# Altium PCB RPI 3.PcbDoc
Units mil, origin at the board's own origin, x right, y up, seen from the top; angles counter-clockwise.
Board outline 2558.74 x 2204.72 mil, 2 copper layers (Top Layer, Bottom Layer), stack 61.2 mil thick; 45 components, 48 nets, 202 pads, 44 vias.
Unrouted connection lines stored in the file: 1.
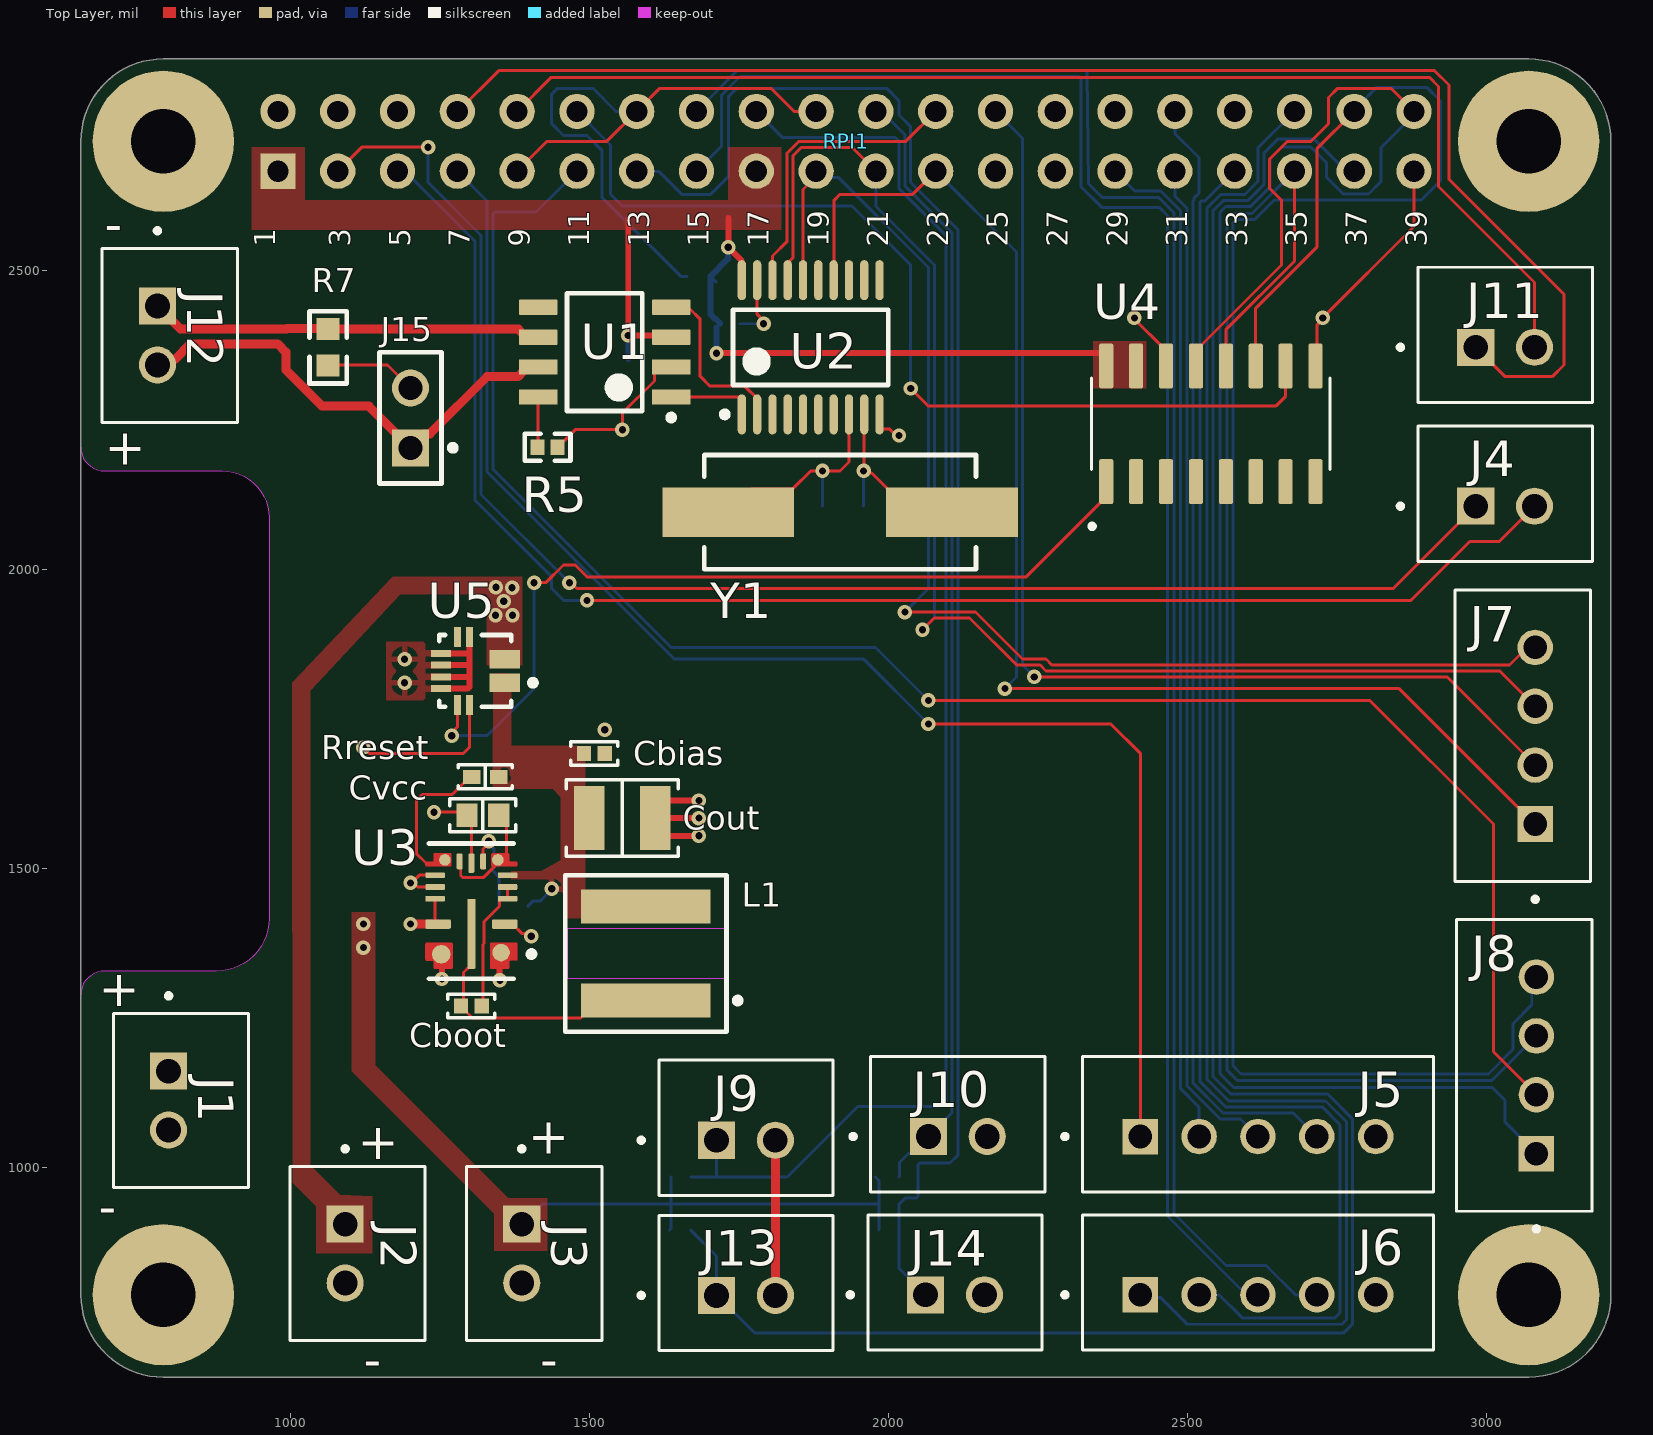
[diagram p0: Top Layer view]
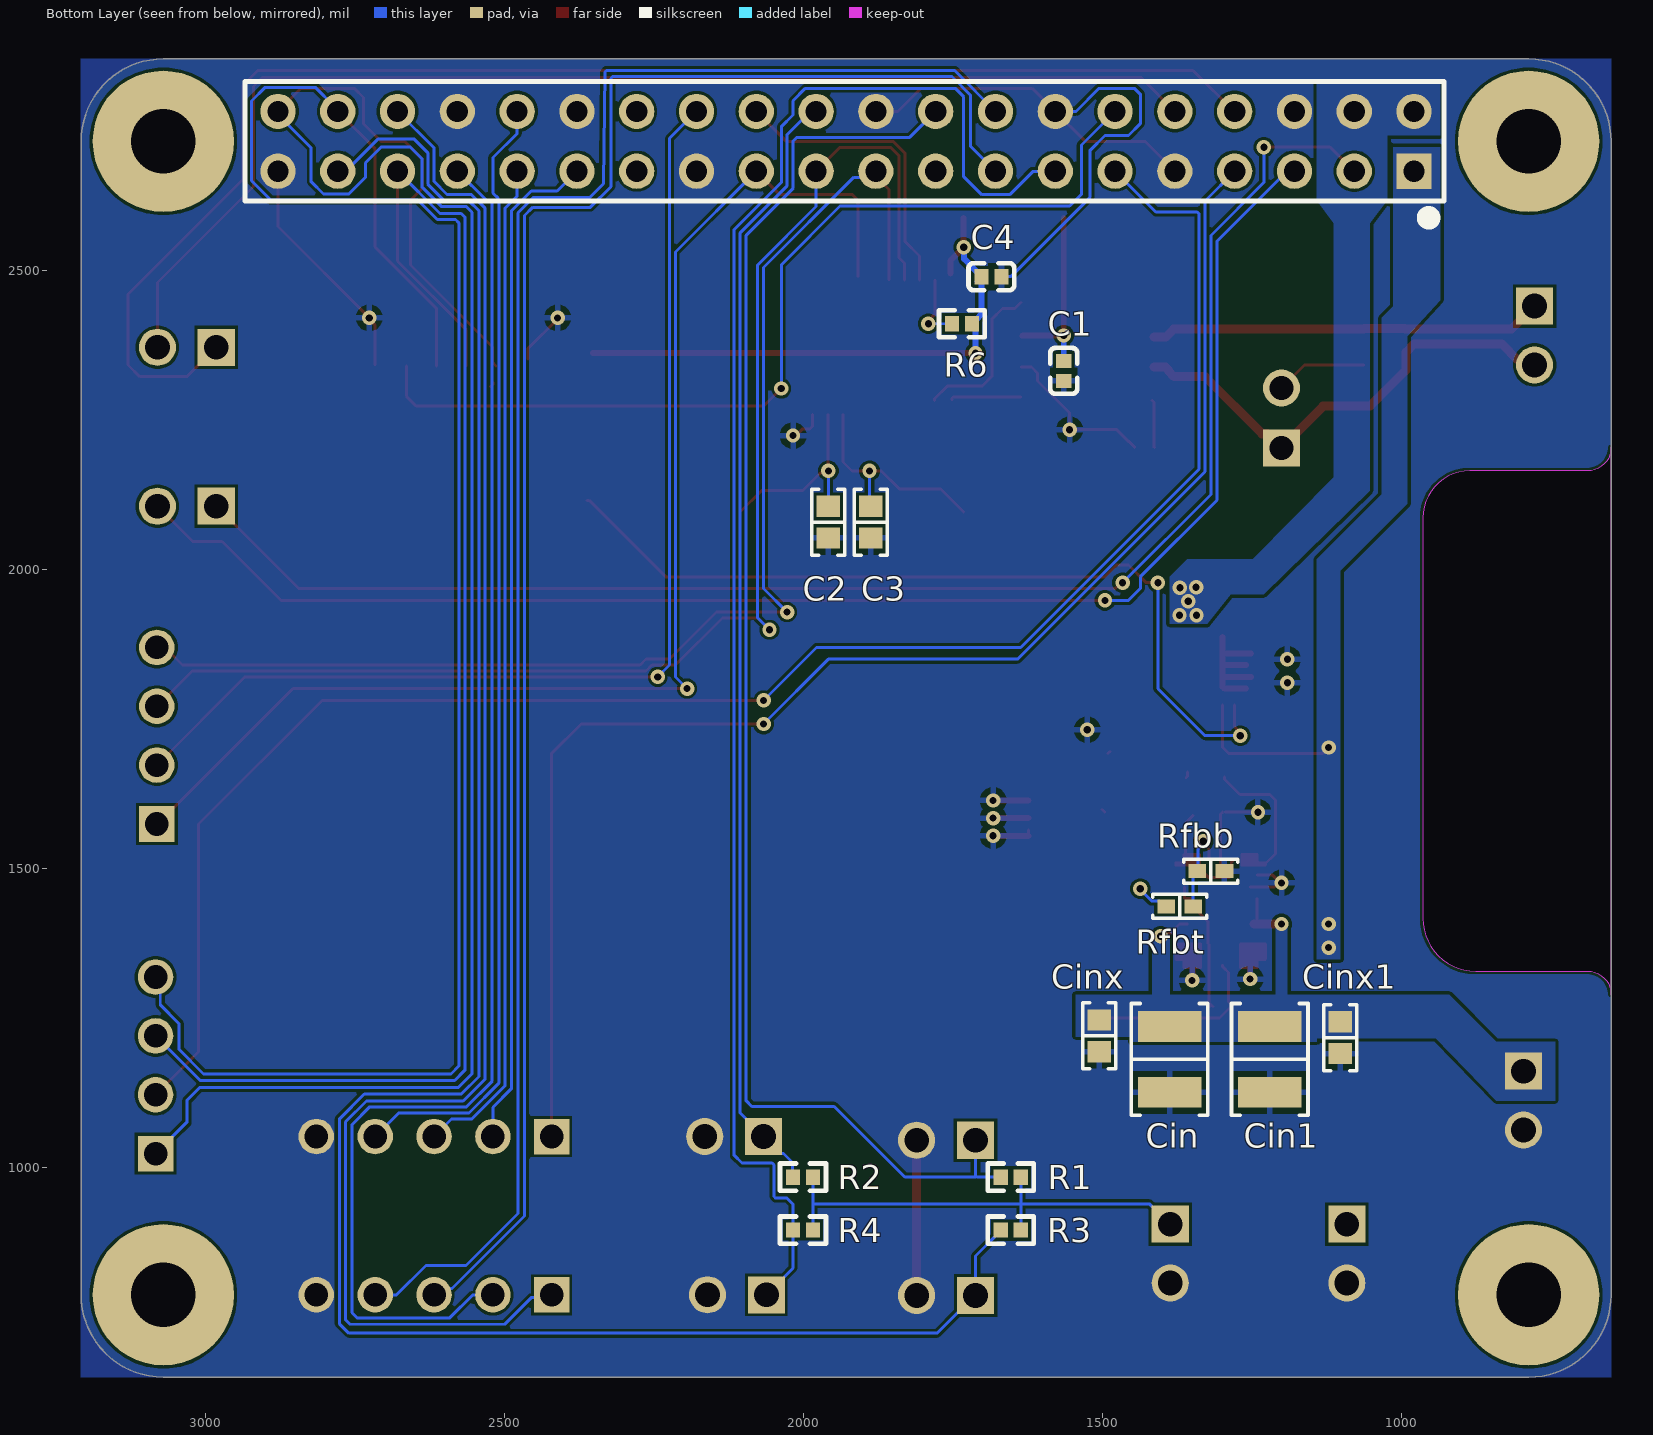
[diagram p1: Bottom Layer view, seen from below]

## Layer stack, top to bottom
Top Solder: solder mask 0.8, Solder Resist, Dk 3.5
Top Layer: signal copper 2.1
Dielectric 1: dielectric 57, FR-4, Dk 4.6
Bottom Layer: signal copper 2.1
Bottom Solder: solder mask 0.8, Solder Resist, Dk 3.5

## Board outline
649.61,787.4 ccw(c787.4,787.4) 787.4,649.61 3070.87,649.61 ccw(c3070.71,787.24) 3208.35,787.4 3208.35,2716.54 ccw(c3070.71,2716.69) 3070.87,2854.33 787.4,2854.33 ccw(c787.4,2716.54) 649.61,2716.54
cut-out: 649.61,1289.37 649.61,2204.72 ccw(c688.97,2204.72) 688.98,2165.35 885.83,2165.35 cw(c885.83,2086.61) 964.57,2086.61 964.57,1417.32 cw(c875.99,1417.32) 875.98,1328.74 688.98,1328.74 ccw(c688.97,1289.37)

## Design rules (kind name [scope] priority, off if disabled: settings)
Clearance [All] p1: gap=5 ignorepadtopadclearanceinfootprint=FALSE except(10: Arc-Hole Track-Hole SMDPad-Hole THPad-Hole Via-Hole Fill-Hole Poly-Hole Region-Hole Text-Hole; 20: THPad-THPad)
DiffPairsRouting [All] p1: maxlimit=10 minlimit=10 mostfreqgap=10 toplayer_minwidth=15 toplayer_maxwidth=15 toplayer_prefwidth=15 bottomlayer_minwidth=15 bottomlayer_maxwidth=15 bottomlayer_prefwidth=15 maxuncoupledlength=500
HoleSize [All] p1: absolutevalues=TRUE maxlimit=100 minlimit=11.81 maxpercent=80.000 minpercent=20.000
HoleToHoleClearance [All] p1: gap=9.84 allowstackedmicrovias=TRUE
PolygonConnect [All] p1: thpad.connectstyle=Direct thpad.reliefconductorwidth=10 thpad.reliefentries=4 thpad.polygonreliefangle="90 Angle" thpad.airgapwidth=10 smdpad.connectstyle=Relief smdpad.reliefconductorwidth=10 smdpad.reliefentries=4 smdpad.polygonreliefangle="90 Angle" smdpad.airgapwidth=10 via.connectstyle=Relief via.reliefconductorwidth=10 via.reliefentries=4 via.polygonreliefangle="90 Angle" via.airgapwidth=10
RoutingVias [All] p1: holewidth=12.6 width=27.56 viastyle="Through Hole" minholewidth=11.81 minwidth=23.62 maxholewidth=196.85 maxwidth=393.7
SolderMaskExpansion [All] p1: expansion=4 istentingtop=FALSE
Width [All] p1: maxlimit=100 minlimit=5 preferedwidth=5 minimp=50.000000 maximp=50.000000 favimp=50.000000
27 further rules are at their usual default settings.

## Classes and differential pairs
differential pair CAN1: +CAN1_P -CAN1_N

## Components (designator, comment, footprint, x,y, rotation, side; value= is the part's Value field where it differs from the comment)
C1 "100pF" 0402_C 1564.96,2332.68 r90 bottom
C2 "32 pF" "CAP 0603_1608" 1958.66,2079.72 r90 bottom
C3 "32 pF" "CAP 0603_1608" 1887.63,2079.72 r90 bottom
C4 "100pF" 0402_C 1686.02,2490.16 r0 bottom
Cbias "0.1 µF" "CAP 0402_1005" 1508.27,1692.91 r180 top
Cboot "0.1 µF" "CAP 0402_1005" 1302.64,1270.35 r180 top
Cin "10 µF" "CAP 1210_3225 - 1MM" 1387.8,1181.1 r90 bottom
Cin1 "10 µF" "CAP 1210_3225 - 1MM" 1220.47,1181.1 r90 bottom
Cinx "1 µF" "CAP 0603_1608" 1505.91,1220.47 r90 bottom
Cinx1 "1 µF" "CAP 0603_1608" 1102.36,1217.52 r90 bottom
Cout "150 µF" "CAP 1210_3225 - 1MM" 1555.12,1584.81 r180 top
Cvcc "1 µF" "CAP 0603_1608" 1321.85,1589.4 r0 top
J1 "B2B-XH-A(LF)(SN)" JST_B2B-XH-A(LF)(SN) 816.93,1112.2 r270 top
J2 "B2B-XH-A(LF)(SN)" JST_B2B-XH-A(LF)(SN) 1112.2,856.3 r270 top
J3 "B2B-XH-A(LF)(SN)" JST_B2B-XH-A(LF)(SN) 1407.48,856.3 r270 top
J4 "B2B-XH-A(LF)(SN)" JST_B2B-XH-A(LF)(SN) 3031.5,2126.97 r0 top
J5 "B5B-XH-A(LF)(SN)" JST_B5B-XH-A(LF)(SN) 2618.11,1072.83 r0 top
J6 "B5B-XH-A(LF)(SN)" JST_B5B-XH-A(LF)(SN) 2618.11,808.07 r0 top
J7 "B4B-XH-A(LF)(SN)" JST_B4B-XH-A(LF)(SN) 3061.02,1722.44 r90 top
J8 "B4B-XH-A(LF)(SN)" JST_B4B-XH-A(LF)(SN) 3063.16,1171.26 r90 top
J9 "B2B-XH-A(LF)(SN)" JST_B2B-XH-A(LF)(SN) 1761.81,1066.59 r0 top
J10 "B2B-XH-A(LF)(SN)" JST_B2B-XH-A(LF)(SN) 2116.14,1072.83 r0 top
J11 "B2B-XH-A(LF)(SN)" JST_B2B-XH-A(LF)(SN) 3031.5,2392.72 r0 top
J12 "B2B-XH-A(LF)(SN)" JST_B2B-XH-A(LF)(SN) 798.23,2391.73 r270 top
J13 "B2B-XH-A(LF)(SN)" JST_B2B-XH-A(LF)(SN) 1761.81,807.09 r0 top
J14 "B2B-XH-A(LF)(SN)" JST_B2B-XH-A(LF)(SN) 2111.39,808.07 r0 top
J15 "M20-9990245" FP-M20-9990245-MFG 1200.79,2253.94 r90 top
L1 "74439346047" WE-XHMI_6060_L6.65W6.45H5.8 1594.49,1358.27 r180 top
R1 "10KΩ ±1%" 0402_R 1653.54,984.25 r180 bottom
R2 "10KΩ ±1%" 0402_R 2000.98,984.25 r180 bottom
R3 "10KΩ ±1%" 0402_R 1653.54,895.67 r180 bottom
R4 "10KΩ ±1%" 0402_R 2000.98,895.67 r180 bottom
R5 "10KΩ ±1%" 0402_R 1430.12,2204.72 r180 top
R6 "10KΩ ±1%" 0402_R 1735.24,2411.42 r180 bottom
R7 "120Ω ±1%" 0603_R 1062.99,2372.05 r270 top
Rfbb "24.3 kOhms" "RES 0402_1005" 1318.9,1496.06 r0 bottom
Rfbt "100 kOhms" "RES 0402_1005" 1371.06,1437.01 r0 bottom
RPI1 "RPI GPIO Connector" RPI 1929.13,2716.54 r180 top
Rreset "100 kOhms" "RES 0402_1005" 1325.79,1653.54 r180 top
U1 "SN65HVD230D" D0008A_M 1525.59,2364.01 r180 top
U2 "MCP2515-I/ST" TSSOP-ST20_N 1870.08,2372.05 r90 top
U3 "LM61495QRPHRQ1" FP-RPH0016A-MFG 1302.64,1429.13 r180 top
U4 "MCP3008-I/SL" SOIC127P600X175-16N 2539.37,2244.09 r90 top
U5 "ACS71240KEXBLT-010B3" FP-EXB-12-MFG 1309.06,1830.71 r180 top
Y1 "16 MHz" "ABRACON ABLS" 1919.29,2096.46 r0 top

## Footprints (in the part's own frame and the unit in brackets; to place one, negate y for a bottom-side part, rotate by r counter-clockwise, add the part's x,y. Pads: shape width x height; smd on the part's side, far side on the other; paste and mask are expansions set on the pad)
0402_C [mm]
  rect 0.6x0.65 smd mask+0.051: 1(-0.425,0) 2(0.425,0)
  silkscreen extent -0.97,-0.58 0.97,0.58, body extent -0.48,-0.3 0.52,0.3, height 0.2
0402_R [mm]
  rect 0.6x0.65 smd mask+0.051: 1(-0.425,0) 2(0.425,0)
  silkscreen extent -0.97,-0.58 0.97,0.58, body extent -0.57,-0.27 0.58,0.28, height 0.41
0603_R [mm]
  rect 0.93x0.98 smd: 1(-0.77,0) 2(0.77,0)
  silkscreen extent -1.53,-0.79 1.54,0.79, body extent -0.85,-0.4 0.85,0.4, height 0.56
"ABRACON ABLS" [mm] "Crystal, 2-Leads, Body 4.70x11.40mm, Pitch 8.80mm, IPC Medium Density"
  rect 5.6x2.1 smd: 1(-4.75,0) 2(4.75,0)
  silkscreen extent -5.77,-2.43 5.77,2.43, body extent -6.35,-2.35 6.35,2.35, height 4.2
"CAP 0402_1005" [mm] "Chip Capacitor, 2-Leads, Body 1.02x0.51mm, IPC Medium Density"
  rect 0.6x0.64 smd: 1(-0.44,0) 2(0.44,0)
  silkscreen extent -1,-0.5 1,0.5, body extent -0.5,-0.26 0.5,0.26, height 0.52
"CAP 0603_1608" [mm] "Chip Capacitor, 2-Leads, Body 1.60x0.80mm, IPC Medium Density"
  rect 0.9x1 smd: 1(-0.675,0) 2(0.675,0)
  silkscreen extent -1.4,-0.7 1.4,0.7, body extent -0.8,-0.41 0.8,0.41, height 0.82
"CAP 1210_3225 - 1MM" [mm] "Chip Capacitor, 2-Leads, Body 3.20x2.50mm, IPC Medium Density"
  rect 1.3x2.7 smd: 1(-1.4,0) 2(1.4,0)
  silkscreen extent -2.37,-1.63 2.37,1.63, body extent -1.6,-1.25 1.6,1.25, height 1
D0008A_M [mm] "SOIC, 8-Leads, Body 5x4mm, Pitch 1.27mm, IPC Low Density"
  rrect15% 1.65x0.65 smd: 1(-2.825,1.905) 2(-2.825,0.635) 3(-2.825,-0.635) 4(-2.825,-1.905) 5(2.825,-1.905) 6(2.825,-0.635) 7(2.825,0.635) 8(2.825,1.905)
  silkscreen extent -2.95,-2.5 1.6,2.9, body extent -3,-2.45 3,2.45, height 1.63
FP-EXB-12-MFG [mm]
  rect 1.3x0.8 smd paste+0 mask+0: 1-2(-1.25,0.5) 3-4(-1.25,-0.5)
  rect 0.3x0.85 smd paste+0 mask+0: 5(0.25,-1.45) 6(0.75,-1.45) 11(0.75,1.45) 12(0.25,1.45)
  rect 0.85x0.3 smd paste+0 mask+0: 7(1.45,-0.75) 8(1.45,-0.25) 9(1.45,0.25) 10(1.45,0.75)
  silkscreen extent -2.58,-1.53 1.53,1.53, body extent -2,-1.97 1.97,1.97, height 0.25
FP-M20-9990245-MFG [mm]
  rect 1.57x1.57 hole 1.02 paste-2539.97 mask+0: 1(-1.27,0)
  round 1.57 hole 1.02 paste-2539.97 mask+0: 2(1.27,0)
  silkscreen extent -2.79,-1.92 2.79,1.32, body extent -2.89,-1.42 2.89,1.42, height 0.25
FP-RPH0016A-MFG [mm]
  round 0.743 smd paste-1000 mask+0: 1(-1.262,1.763)
  rrect25% 1.075x0.4 smd paste+0 mask+0: 2(-1.413,0.55) 14(1.413,0.55)
  rrect40% 0.825x0.25 smd paste+0 mask+0: 3(-1.538,-0.525) 4(-1.538,-1.025) 5(-1.538,-1.525) 11(1.538,-1.525) 12(1.538,-1.025) 13(1.538,-0.525)
  round 0.495 smd paste-1000 mask+0: 6(-1.125,-2.175) 10(1.125,-2.175)
  rrect40% 0.25x0.675 smd paste+0 mask+0: 7(-0.5,-2.113) 9(0.5,-2.113)
  rrect40% 0.25x0.825 smd paste+0 mask+0: 8(0,-2.038)
  round 0.787 smd paste-1000 mask+0: 15(1.281,1.831)
  rrect29% 0.35x2.975 smd paste+0 mask+0: 16(0,0.963)
  Top Layer region: -1.55,-2.45 -1.575,-2.443 -1.593,-2.425 -1.6,-2.4 -1.6,-2.4 -1.6,-2.15 -1.604,-2.131 -1.615,-2.115 -1.631,-2.104 -1.65,-2.1 -1.65,-2.1 -1.9,-2.1 -1.925,-2.093 -1.943,-2.075 -1.95,-2.05 -1.95,-2.05 -1.95,-1.95 -1.943,-1.925 -1.925,-1.907 -1.9,-1.9 -1.9,-1.9 -0.9,-1.9 -0.875,-1.907 -0.857,-1.925 -0.85,-1.95 -0.85,-1.95 -0.85,-2.4 -0.857,-2.425 -0.875,-2.443 -0.9,-2.45 -0.9,-2.45 -0.9,-2.45
  Top Layer region: 1.55,-2.45 1.575,-2.443 1.593,-2.425 1.6,-2.4 1.6,-2.4 1.6,-2.15 1.604,-2.131 1.615,-2.115 1.631,-2.104 1.65,-2.1 1.65,-2.1 1.9,-2.1 1.925,-2.093 1.943,-2.075 1.95,-2.05 1.95,-2.05 1.95,-1.95 1.943,-1.925 1.925,-1.907 1.9,-1.9 1.9,-1.9 0.9,-1.9 0.875,-1.907 0.857,-1.925 0.85,-1.95 0.85,-1.95 0.85,-2.4 0.857,-2.425 0.875,-2.443 0.9,-2.45 0.9,-2.45 0.9,-2.45
  Top Layer region: -1.9,1.35 -1.925,1.357 -1.943,1.375 -1.95,1.4 -1.95,1.4 -1.95,2.05 -1.943,2.075 -1.925,2.093 -1.9,2.1 -1.9,2.1 -1.65,2.1 -1.631,2.104 -1.615,2.115 -1.604,2.131 -1.6,2.15 -1.6,2.15 -1.6,2.4 -1.593,2.425 -1.575,2.443 -1.55,2.45 -1.55,2.45 -0.85,2.45 -0.825,2.443 -0.807,2.425 -0.8,2.4 -0.8,2.4 -0.8,1.4 -0.807,1.375 -0.825,1.357 -0.85,1.35 -0.85,1.35 -0.85,1.35
  Top Layer region: 1.9,1.35 1.925,1.357 1.943,1.375 1.95,1.4 1.95,1.4 1.95,2.05 1.943,2.075 1.925,2.093 1.9,2.1 1.9,2.1 1.65,2.1 1.631,2.104 1.615,2.115 1.604,2.131 1.6,2.15 1.6,2.15 1.6,2.4 1.593,2.425 1.575,2.443 1.55,2.45 1.55,2.45 0.85,2.45 0.825,2.443 0.807,2.425 0.8,2.4 0.8,2.4 0.8,1.4 0.807,1.375 0.825,1.357 0.85,1.35 0.85,1.35 0.85,1.35
  silkscreen extent -2.68,-2.88 1.8,2.88, body extent -2.05,-2.55 2.05,2.55, height 0.25
JST_B2B-XH-A(LF)(SN) [mm]
  rect 1.575x1.575 / inner round 1.575 / far side rect 1.575x1.575 hole 1.05: 1(-1.25,-0.525)
  round 1.575 hole 1.05: 2(1.25,-0.525)
  silkscreen extent -4.55,-2.88 3.7,2.88, body extent -3.7,-2.88 3.7,2.88, height 7
JST_B4B-XH-A(LF)(SN) [mm]
  rect 1.508x1.508 / inner round 1.508 / far side rect 1.508x1.508 hole 1: 1(-3.75,-0.525)
  round 1.508 hole 1: 2(-1.25,-0.525) 3(1.25,-0.525) 4(3.75,-0.525)
  silkscreen extent -7.05,-2.88 6.2,2.88, body extent -6.2,-2.88 6.2,2.88, height 7
JST_B5B-XH-A(LF)(SN) [mm]
  rect 1.508x1.508 / inner round 1.508 / far side rect 1.508x1.508 hole 1: 1(-5,-0.525)
  round 1.508 hole 1: 2(-2.5,-0.525) 3(0,-0.525) 4(2.5,-0.525) 5(5,-0.525)
  silkscreen extent -8.3,-2.88 7.45,2.88, body extent -7.45,-2.88 7.45,2.88, height 7
"RES 0402_1005" [mm] "Chip Resistor, 2-Leads, Body 1.0x0.5mm, IPC Medium Density"
  rect 0.75x0.6 smd: 1(-0.575,0) 2(0.575,0)
  silkscreen extent -1.14,-0.51 1.14,0.51, body extent -0.5,-0.25 0.5,0.25, height 0.35
RPI [mm]
  rect 1.5x1.5 hole 0.9: 1(24.13,1.27)
  round 1.5 hole 0.9: 2(24.13,-1.27) 3(21.59,1.27) 4(21.59,-1.27) 5(19.05,1.27) 6(19.05,-1.27) 7(16.51,1.27) 8(16.51,-1.27) 9(13.97,1.27) 10(13.97,-1.27) 11(11.43,1.27) 12(11.43,-1.27) 13(8.89,1.27) 14(8.89,-1.27) 15(6.35,1.27) 16(6.35,-1.27) 17(3.81,1.27) 18(3.81,-1.27) 19(1.27,1.27) 20(1.27,-1.27) 21(-1.27,1.27) 22(-1.27,-1.27) 23(-3.81,1.27) 24(-3.81,-1.27) 25(-6.35,1.27) 26(-6.35,-1.27) 27(-8.89,1.27) 28(-8.89,-1.27) 29(-11.43,1.27) 30(-11.43,-1.27) 31(-13.97,1.27) 32(-13.97,-1.27) 33(-16.51,1.27) 34(-16.51,-1.27) 35(-19.05,1.27) 36(-19.05,-1.27) 37(-21.59,1.27) 38(-21.59,-1.27) 39(-24.13,1.27) 40(-24.13,-1.27)
  body extent -25.52,-2.63 25.53,2.38, height 8.5
SOIC127P600X175-16N [mm]
  rrect25% 1.9x0.6 smd: 1(-2.455,4.445) 2(-2.455,3.175) 3(-2.455,1.905) 4(-2.455,0.635) 5(-2.455,-0.635) 6(-2.455,-1.905) 7(-2.455,-3.175) 8(-2.455,-4.445) 9(2.455,-4.445) 10(2.455,-3.175) 11(2.455,-1.905) 12(2.455,-0.635) 13(2.455,0.635) 14(2.455,1.905) 15(2.455,3.175) 16(2.455,4.445)
  silkscreen extent -4.45,-5.06 1.95,5.14, body extent -3,-4.95 3,4.95, height 1.75
TSSOP-ST20_N [mm] "TSOP, 20-Leads, Body 6.5x4.4mm, Pitch 0.65mm, IPC Medium Density"
  oval 1.7x0.35 smd: 1(-2.85,2.925) 2(-2.85,2.275) 3(-2.85,1.625) 4(-2.85,0.975) 5(-2.85,0.325) 6(-2.85,-0.325) 7(-2.85,-0.975) 8(-2.85,-1.625) 9(-2.85,-2.275) 10(-2.85,-2.925) 11(2.85,-2.925) 12(2.85,-2.275) 13(2.85,-1.625) 14(2.85,-0.975) 15(2.85,-0.325) 16(2.85,0.325) 17(2.85,0.975) 18(2.85,1.625) 19(2.85,2.275) 20(2.85,2.925)
  silkscreen extent -2.97,-3.3 1.6,3.77, body extent -2.25,-3.3 2.25,3.3, height 1.2
WE-XHMI_6060_L6.65W6.45H5.8 [mm] "SMT Power Inductor, 2-Leads, body 6.65x6.45mm"
  rect 5.5x1.45 smd: 1(0,2) 2(0,-2)
  Top Layer keep-out region: -3.325,1.075 3.325,1.075 3.325,-1.075 -3.325,-1.075
  silkscreen extent -4.03,-3.32 3.42,3.32, body extent -3.32,-3.22 3.33,3.23, height 5.8

## Part data
C1 C4: library part "0402 100pF (101) 5% 50V", "Chip capacitors", Manufacturer="Guangdong Fenghua Advanced Tech", Package=0402, PartNumber=0402CG101J500NT, SuppliersPartNumber=C1546, Tolerance=5%, Voltage=50V, Capacitance=100pF, ComponentLink1Description="Supplier link", ComponentLink1URL=http://www.szlcsc.com/product/details_1898.html, Supplier=LC
C2 C3: library part 06031A320FAT2A, "CAP CER 32PF 100V C0G/NP0 0603", Device Package="0603 (1608 Metric)", Manufacturer="KYOCERA AVX", Operating Temperature="-55°C ~ 125°C", Supplier Part Number 1=478-06031A320FAT2ACT-ND, Temperature Coefficient="C0G, NP0", Tolerance=±1%, Voltage - Rated=100V, Applications="General Purpose", Capacitance="32 pF", ComponentLink1Description=Datasheet, ComponentLink1URL=https://datasheets.kyocera-avx.com/C0GNP0-Dielectric.pdf, componentlink2description="DigiKey Link", componentlink2url=https://www.digikey.com/en/products/detail/kyocera-avx/06031A320FAT2A/1598465, lastupdated="2023-12-31 8:09:49 PM", Lifecycle Status=Active, Minimum Order=1, Mounting Type="Surface Mount, MLCC", Package / Case="0603 (1608 Metric)", packaging=TapeAndReel, Part Number=06031A320FAT2A, Part Status=Active, partid=40205, price=0.07, series=-, Size / Dimension="0.063\" L x 0.032\" W (1.60mm x 0.81mm)", Supplier 1=DigiKey, Thickness (Max)="0.035\" (0.90mm)"
Cbias: library part CL05B104KO5NFNC, "CAP CER 0.1UF 16V X7R 0402", Device Package="0402 (1005 Metric)", Manufacturer="Samsung Electro-Mechanics", Operating Temperature="-55°C ~ 125°C", Supplier Part Number 1=1276-1508-1-ND, Temperature Coefficient=X7R, Tolerance=±10%, Voltage - Rated=16V, Applications="General Purpose", Capacitance="0.1 µF", ComponentLink1Description=Datasheet, ComponentLink1URL=http://www.samsungsem.com/kr/support/product-search/mlcc/CL05B104KO5NFNC.jsp, componentlink2description="DigiKey Link", componentlink2url=https://www.digikey.com/en/products/detail/samsung-electro-mechanics/CL05B104KO5NFNC/3887166, lastupdated="2023-12-31 8:04:20 PM", Lifecycle Status=Active, Minimum Order=1, Mounting Type="Surface Mount, MLCC", Package / Case="0402 (1005 Metric)", packaging=CutTape, Part Number=CL05B104KO5NFNC, Part Status=Active, partid=11675, price=0.01, series=CL, Size / Dimension="0.039\" L x 0.020\" W (1.00mm x 0.50mm)", Supplier 1=DigiKey, Thickness (Max)="0.022\" (0.55mm)"
Cboot: library part CL05B104KP5NNNC, "CAP CER 0.1UF 10V X7R 0402", Device Package="0402 (1005 Metric)", Manufacturer="Samsung Electro-Mechanics", Operating Temperature="-55°C ~ 125°C", Supplier Part Number 1=1276-1002-1-ND, Temperature Coefficient=X7R, Tolerance=±10%, Voltage - Rated=10V, Applications="General Purpose", Capacitance="0.1 µF", ComponentLink1Description=Datasheet, ComponentLink1URL=http://www.samsungsem.com/kr/support/product-search/mlcc/CL05B104KP5NNNC.jsp, componentlink2description="DigiKey Link", componentlink2url=https://www.digikey.com/en/products/detail/samsung-electro-mechanics/CL05B104KP5NNNC/3886660, lastupdated="2023-12-31 8:04:29 PM", Lifecycle Status=Active, Minimum Order=1, Mounting Type="Surface Mount, MLCC", Package / Case="0402 (1005 Metric)", packaging=CutTape, Part Number=CL05B104KP5NNNC, Part Status=Active, partid=6068, price=0.01, series=CL, Size / Dimension="0.039\" L x 0.020\" W (1.00mm x 0.50mm)", Supplier 1=DigiKey, Thickness (Max)="0.022\" (0.55mm)"
Cin Cin1: library part GRM32ER71H106KA12L, "CAP CER 10UF 50V X7R 1210", Device Package="1210 (3225 Metric)", Manufacturer="Murata Electronics", Operating Temperature="-55°C ~ 125°C", Supplier Part Number 1=490-6544-1-ND, Temperature Coefficient=X7R, Tolerance=±10%, Voltage - Rated=50V, Applications="General Purpose", Capacitance="10 µF", ComponentLink1Description=Datasheet, ComponentLink1URL=https://www.murata.com/~/media/webrenewal/support/library/catalog/products/capacitor/mlcc/c02e.ashx?la=en-us, componentlink2description="DigiKey Link", componentlink2url=https://www.digikey.com/en/products/detail/murata-electronics/GRM32ER71H106KA12L/2548481, lastupdated="2023-12-31 8:40:05 PM", Lifecycle Status=Active, Minimum Order=1, Mounting Type="Surface Mount, MLCC", Package / Case="1210 (3225 Metric)", packaging=TapeAndReel, Part Number=GRM32ER71H106KA12L, Part Status=Active, partid=49713, price=0.34, series=GRM, Size / Dimension="0.126\" L x 0.098\" W (3.20mm x 2.50mm)", Supplier 1=DigiKey, Thickness (Max)="0.106\" (2.70mm)"
Cinx Cinx1: library part C1608X5R1H105K080AB, "CAP CER 1UF 50V X5R 0603", Device Package="0603 (1608 Metric)", Manufacturer="TDK Corporation", Operating Temperature="-55°C ~ 85°C", Supplier Part Number 1=445-7468-1-ND, Temperature Coefficient=X5R, Tolerance=±10%, Voltage - Rated=50V, Applications="General Purpose", Capacitance="1 µF", ComponentLink1Description=Datasheet, ComponentLink1URL=https://product.tdk.com/info/en/catalog/datasheets/mlcc_commercial_general_en.pdf?ref_disty=digikey, componentlink2description="DigiKey Link", componentlink2url=https://www.digikey.com/en/products/detail/tdk-corporation/C1608X5R1H105K080AB/2732903, Features="Low ESL", lastupdated="2023-12-31 8:10:04 PM", Lifecycle Status=Active, Minimum Order=1, Mounting Type="Surface Mount, MLCC", Package / Case="0603 (1608 Metric)", packaging=TapeAndReel, Part Number=C1608X5R1H105K080AB, Part Status=Active, partid=36337, price=0.02, series=C, Size / Dimension="0.063\" L x 0.031\" W (1.60mm x 0.80mm)", Supplier 1=DigiKey, Thickness (Max)="0.035\" (0.90mm)"
Cout: library part CL32A157MQVNNNE, "CAP CER 150UF 6.3V X5R 1210", Device Package="1210 (3225 Metric)", Manufacturer="Samsung Electro-Mechanics", Operating Temperature="-55°C ~ 85°C", Supplier Part Number 1=1276-3367-1-ND, Temperature Coefficient=X5R, Tolerance=±20%, Voltage - Rated=6.3V, Applications="General Purpose", Capacitance="150 µF", ComponentLink1Description=Datasheet, ComponentLink1URL=http://www.samsungsem.com/kr/support/product-search/mlcc/CL32A157MQVNNNE.jsp, componentlink2description="DigiKey Link", componentlink2url=https://www.digikey.com/en/products/detail/samsung-electro-mechanics/CL32A157MQVNNNE/3889025, lastupdated="2023-12-31 8:40:03 PM", Lifecycle Status=Active, Minimum Order=1, Mounting Type="Surface Mount, MLCC", Package / Case="1210 (3225 Metric)", packaging=TapeAndReel, Part Number=CL32A157MQVNNNE, Part Status=Active, partid=23856, price=0.35, series=CL, Size / Dimension="0.126\" L x 0.098\" W (3.20mm x 2.50mm)", Supplier 1=DigiKey, Thickness (Max)="0.110\" (2.80mm)"
Cvcc: library part KGM15BR50J105KT, "CAP CER 1UF 6.3V X5R 0603", Device Package="0603 (1608 Metric)", Manufacturer="KYOCERA AVX", Operating Temperature="-55°C ~ 85°C", Supplier Part Number 1=478-KGM15BR50J105KTCT-ND, Temperature Coefficient=X5R, Tolerance=±10%, Voltage - Rated=6.3V, Applications="General Purpose", Capacitance="1 µF", ComponentLink1Description=Datasheet, ComponentLink1URL=https://datasheets.kyocera-avx.com/cx5r.pdf, componentlink2description="DigiKey Link", componentlink2url=https://www.digikey.com/en/products/detail/kyocera-avx/KGM15BR50J105KT/717509, lastupdated="2023-12-31 8:09:09 PM", Lifecycle Status=Active, Minimum Order=1, Mounting Type="Surface Mount, MLCC", Package / Case="0603 (1608 Metric)", packaging=TapeAndReel, Part Number=KGM15BR50J105KT, Part Status=Active, partid=53227, price=0.02, series="KGM - X5R", Size / Dimension="0.063\" L x 0.031\" W (1.60mm x 0.80mm)", Supplier 1=DigiKey, Thickness (Max)="0.037\" (0.95mm)"
J1 J2 J3 J4 J9 J10 J11 J12 J13 J14: "Connector Header Through Hole 2 position 0.098 (2.50mm)", Package=None, Check_prices=https://www.snapeda.com/parts/B2B-XH-A(LF)(SN)/JST+Sales+America+Inc./view-part/?ref=eda, MF="JST Sales", MP=B2B-XH-A(LF)(SN), SnapEDA_Link=https://www.snapeda.com/parts/B2B-XH-A(LF)(SN)/JST+Sales+America+Inc./view-part/?ref=snap
J5 J6: "Connector Header Through Hole 5 position 0.098 (2.50mm)", Package=None, Availability="In Stock", Check_prices=https://www.snapeda.com/parts/B5B-XH-A(LF)(SN)/JST+Sales+America+Inc./view-part/?ref=eda, MF="JST Sales America Inc.", MP=B5B-XH-A(LF)(SN), price=None, Purchase-URL=https://pricing.snapeda.com/search/part/B5B-XH-A(LF)(SN)/?ref=eda, SnapEDA_Link=https://www.snapeda.com/parts/B5B-XH-A(LF)(SN)/JST+Sales+America+Inc./view-part/?ref=snap
J7 J8: "Connector Header Through Hole 4 position 0.098 (2.50mm)", Package=None, Availability="In Stock", Check_prices=https://www.snapeda.com/parts/B4B-XH-A(LF)(SN)/JST+Sales+America+Inc./view-part/?ref=eda, MF="JST Sales", MP=B4B-XH-A(LF)(SN), price=None, Purchase-URL=https://pricing.snapeda.com/search/part/B4B-XH-A(LF)(SN)/?ref=eda, SnapEDA_Link=https://www.snapeda.com/parts/B4B-XH-A(LF)(SN)/JST+Sales+America+Inc./view-part/?ref=snap
J15: library part CMP-15831-000105-1, "CONN HEADER VERT 2POS 2.54MM", Case/Package=SIL, Color=Black, Contact Resistance=25mR, Current=3A, Flammability Rating="UL94 V-0", Insulation Resistance=10GR, Max Operating Temperature=105°C, Min Operating Temperature=-40°C, Package Quantity=1000, Voltage=50V, Voltage Rating (AC)=750V, Connector Type="Male Pin", Contact Finish - Mating=GOLD, Contact Material=Brass, Contact Mating Length=0.24inch, Contact Plating=Gold, Contact Shape=Square, Contact Type="Male Pin", Current Rating=3A, Depth=2.54mm, Fastening Type=Pull, Gender=Male, Height=0.12inch, Housing Color=Black, Housing Material=Nylon, Insulation Color=Black, Insulation Material=Nylon, Lead Pitch=2.54mm, Length=5.08mm, Mated Stacking Heights=16.54mm, Mating Cycles=300, Max Current Rating=3A, Mount="Through Hole", Number of Contacts=2, Number of Poles=2, Number of Positions=2, Number of Rows=1, Orientation=Straight, packaging=Bulk, Pitch=2.54mm, Radiation Hardening=No, Reach SVHC Compliant=Yes, series=M20, Termination=Solder, Weight=0.25lb, Width=0.25inch, Working Voltage=750V
L1: library part CMP-207846-000039-2, "FIXED IND 4.7UH 7.4A 13 MOHM", Ambient Temperature Range High=85°C, Ambient Temperature Range Low=-40°C, Current Rating=7.4A, DC Resistance (DCR)=13mΩ, Inductance=4.7µH, Inductance Tolerance=20%, Max Operating Temperature=125°C, Saturation Current=6.5A, Self Resonant Frequency=25MHz, Test Frequency=100kHz, Composition=Wirewound, Height=6.1mm, Length=6.65mm, Min Operating Temperature=-40°C, Mount="Surface Mount", NexarPartId=75811200, Number of Pins=2, REACH SVHC="No SVHC", RMS Current (Irms)=7.4A, RoHS=Compliant, Series Resistance=13mΩ, Tolerance=20%, Width=6.45mm
R1 R2 R3 R4 R5 R6: library part "0402 10K (1002) 1%", "Chip resistor", Manufacturer="Uniroyal Elec", Package=0402, PartNumber=0402WGF1002TCE, Power=1/16W, Resistance=10KΩ, SuppliersPartNumber=C25744, Tolerance=1%, ComponentLink1Description="Supplier link", ComponentLink1URL=http://www.szlcsc.com/product/details_26487.html, Supplier=LC
R7: library part "0603 120R (1200) 1%", "Chip resistor", Manufacturer="Uniroyal Elec", Package=0603, PartNumber=0603WAF1200T5E, Power=1/10W, Resistance=120Ω, SuppliersPartNumber=C22787, Tolerance=1%, ComponentLink1Description="Supplier link", ComponentLink1URL=http://www.szlcsc.com/product/details_23514.html, Supplier=LC
Rfbb: library part CRCW040224K3FKTD, "RES SMD 24.3K OHM 1% 1/16W 0402", Device Package="0402 (1005 Metric)", Manufacturer="Vishay Dale", Operating Temperature="-55°C ~ 155°C", Power (Watts)="0.063W, 1/16W", Ratings=AEC-Q200, Supplier Device Package=0402, Supplier Part Number 1=541-CRCW040224K3FKTDCT-ND, Temperature Coefficient=±100ppm/°C, Tolerance=±1%, ComponentLink1Description=Datasheet, ComponentLink1URL=https://www.vishay.com/docs/20008/dcrcw.pdf, componentlink2description="DigiKey Link", componentlink2url=https://www.digikey.com/en/products/detail/vishay-dale/CRCW040224K3FKTD/1221116, Composition="Thick Film", Features="Automotive AEC-Q200", Height - Seated (Max)="0.016\" (0.40mm)", lastupdated="2023-12-31 8:26:27 PM", Lifecycle Status=Active, Minimum Order=1, Number of Terminations=2, Package / Case="0402 (1005 Metric)", packaging=TapeAndReel, Part Number=CRCW040224K3FKTD, partid=81813, price=0.01, Resistance="24.3 kOhms", series=CRCW, Size / Dimension="0.039\" L x 0.020\" W (1.00mm x 0.50mm)", Supplier 1=DigiKey
Rfbt Rreset: library part CRCW0402100KFKED, "RES SMD 100K OHM 1% 1/16W 0402", Device Package="0402 (1005 Metric)", Manufacturer="Vishay Dale", Operating Temperature="-55°C ~ 155°C", Power (Watts)="0.063W, 1/16W", Ratings=AEC-Q200, Supplier Device Package=0402, Supplier Part Number 1=541-100KLCT-ND, Temperature Coefficient=±100ppm/°C, Tolerance=±1%, ComponentLink1Description=Datasheet, ComponentLink1URL=http://www.vishay.com/docs/20035/dcrcwe3.pdf, componentlink2description="DigiKey Link", componentlink2url=https://www.digikey.com/en/products/detail/vishay-dale/CRCW0402100KFKED/1178235, Composition="Thick Film", Features="Automotive AEC-Q200", Height - Seated (Max)="0.016\" (0.40mm)", lastupdated="2023-12-31 8:27:39 PM", Lifecycle Status=Active, Minimum Order=1, Number of Terminations=2, Package / Case="0402 (1005 Metric)", packaging=CutTape, Part Number=CRCW0402100KFKED, Part Status=Active, partid=11959, price=0.01, Resistance="100 kOhms", series=CRCW, Size / Dimension="0.039\" L x 0.020\" W (1.00mm x 0.50mm)", Supplier 1=DigiKey
RPI1: library part "rpi connector", "GPIO Header for Raspberry Pi A+/B+/Pi 2/Pi 3 - 2x20", Manufacturer="SparkFun Electronics", Manufacturer Part Number=PRT-14017, Supplier Part Number 1=1568-1462-ND, Accessory Type=Connector, Category="Development Boards, Kits, Programmers", ComponentLink1Description=https://cdn.sparkfun.com/datasheets/Dev/RaspberryPi/12313.pdf, ComponentLink1URL=https://cdn.sparkfun.com/datasheets/Dev/RaspberryPi/12313.pdf, For Use With/Related Products="Raspberry Pi", Nils Minor=author, nilsminor@web.de=mail, Part Status=Active, Pricing 1="1=1.84 (EUR)", RoHS="RoHS Compliant", Stock 1=150, Supplier 1=Digi-Key
U1: library part CMP-0315-00046-3, "CAN Bus Transceiver, 3.3 V, -40 to 85 degC, 8-Pin SOIC (D), Green (RoHS & no Sb/Br), Tube", Generic Part Number=SN65HVD230, Supply Voltage Max="3.6 V", Supply Voltage Min="3 V", Temperature Max="85 degC", Temperature Min="-40 degC", ComponentLink1Description="Manufacturer URL", ComponentLink1URL=http://www.ti.com/, componentlink2description=Datasheet, componentlink2url="http://www.ti.com/general/docs/lit/getliterature.tsp?genericGeneric Part Number=SN65HVD230&fileType=pdf", DatasheetVersion=SLOS346N, Mounting Technology="Surface Mount", PackageDescription="8-Pin Plastic Small Outline, Body 4.9 x 3.9 mm, Pitch 1.27 mm", Packing=Tube, PartNumber=SN65HVD230D, RoHS=TRUE
U2: library part CMP-0186-00077-2, "Stand-Alone CAN Controller With SPI Interface, 20-Pin TSSOP, Industrial Temperature", Code_JEDEC=MO-153-AC, ComponentLink1Description="Manufacturer URL", ComponentLink1URL=http://www.microchip.com/, componentlink2description=Datasheet, componentlink2url=http://ww1.microchip.com/downloads/en/DeviceDoc/21801f.pdf, ComponentLink3Description="Package Specification", ComponentLink3URL=http://www.microchip.com/stellent/groups/techpub_sg/documents/packagingspec/en012702.pdf, DatasheetVersion="revF, Oct-2010", PackageDescription="20-Lead Plastic Thin Shrink Small Outline (ST) - 4.4mm Body [TSSOP]", PackageReference=TSSOP-ST20, PackageVersion="revBB, Aug-2009", RevisionNote="URLs added. DatasheetVersion updated."
U3: library part CMP-04918-000418-1, "10-A automotive buck converter optimized for power density and low EMI 16-VQFN-HR -40 to 150"
U4: "10 Bit Analog to Digital Converter 4, 8 Input 1 SAR 16-SOIC", Package="SOIC-16 Microchip", Availability="In Stock", Check_prices=https://www.snapeda.com/parts/MCP3008-I/SL/Microchip/view-part/?ref=eda, MF=Microchip, MP=MCP3008-I/SL, price=None, Purchase-URL=https://pricing.snapeda.com/search/part/MCP3008-I/SL/?ref=eda, SnapEDA_Link=https://www.snapeda.com/parts/MCP3008-I/SL/Microchip/view-part/?ref=snap
U5: library part CMP-82923-000018-1, "AUTOMOTIVE-GRADE, GALVANICALLY I"
Y1: library part ABLS-16.000MHZ-D-3-Y-T, "CRYSTAL 16.0000MHZ 18PF SMD", ESR (Equivalent Series Resistance)="40 Ohms", Frequency Stability=±30ppm, Frequency Tolerance=±25ppm, Load Capacitance=18pF, Manufacturer="Abracon LLC", Operating Mode=Fundamental, Operating Temperature="-40°C ~ 85°C", Package / Case=HC-49/US, Supplier Part Number 1=535-14882-1-ND, ComponentLink1Description=Datasheet, ComponentLink1URL=https://abracon.com/Resonators/abls.pdf, componentlink2description="DigiKey Link", componentlink2url=https://www.digikey.com/en/products/detail/abracon-llc/ABLS-16-000MHZ-D-3-Y-T/9997790, Frequency="16 MHz", Height - Seated (Max)="0.165\" (4.20mm)", lastupdated="2023-12-31 9:29:55 PM", Lifecycle Status=Active, Minimum Order=1, Mounting Type="Surface Mount", packaging=TapeAndReel, Part Number=ABLS-16.000MHZ-D-3-Y-T, Part Status=Active, partid=74, price=0.09, series=ABLS, Size / Dimension="0.449\" L x 0.185\" W (11.40mm x 4.70mm)", Supplier 1=DigiKey, Type="MHz Crystal"

## Free pads (board coordinates)
  round 236.22 hole 108.27: ""(787.4,787.4) ""(787.4,2716.54) ""(3070.87,787.4) ""(3070.87,2716.54)

## Via types
v1: diameter 24, hole 12, Top Layer to Bottom Layer, 44 vias

## Nets (pads, with @x,y where several pads share a name; then routed paths per layer and width w, separated by ;. In a path a pad name is that pad's centre, name@x,y a point inside that pad or via, vN(x,y) a via of type N, cw(c..) or ccw(c..) an arc to the next point about the centre after c; other vN are vias at no path point)
CAN1_N: J12.1 R7.1 U1.6 | length 657.7
  Top Layer w15: J12.1 815.85,2402.66 993.6,2402.66 ; 994.09,2403.15 R7.1@1062.99,2403.15 ; R7.1 1381.33,2402.36 1394.69,2389.01 U1.6
CAN1_P: J12.2 J15.1 U1.7 | length 797.8
  Top Layer w15: J12.2 786.55,2351.51 806.24,2351.51 832.38,2377.66 978.64,2377.66 992.35,2363.95 992.35,2334.42 1053.15,2273.62 1131.1,2273.62 J15.1 1224.19,2227.34 1233.25,2227.34 1328.74,2322.83 1380.6,2322.83 1389.39,2331.62 1389.39,2333.71 1394.69,2339.01 U1.7
CAN1_RX: U1.4 U2.2 | length 269.5
  Top Layer w5: U1.4@1636.81,2447.05 1647.11,2436.75 1667.58,2436.75 1685.34,2418.99 1685.34,2323.49 1701.79,2307.05 1759.88,2307.05 1781.5,2285.43 U2.2@1781.5,2283.46
CAN1_TX: U1.1 U2.1 | length 119.5
  Top Layer w5: U1.1 1749.96,2289.01 1752.05,2286.91 U2.1@1752.05,2283.55
GND: C1.1 C2.1 C3.1 C4.1 Cbias.1 Cin1.1 Cin.1 Cinx1.1 Cinx.1 Cout.1 Cvcc.1 J1.2 J2.2 J3.2 J5.5 J6.5 J9.2 J10.2 J13.2 J14.2 R5.1 Rfbb.1 RPI1.6 RPI1.9 RPI1.14 RPI1.20 RPI1.25 RPI1.30 RPI1.34 RPI1.39 U1.2 U2.10 U3.1 U3.8 U3.11 U3.12 U3.15 U4.9 U4.14 U5.5 U5.7 U5.8 U5.9 U5.10 | length 2975.6
  Top Layer w5: v1(1200.79,1476.38) v1@1202.77,1476.38 ; U3.12@1240.16,1469.49 1212.82,1469.49 1205.93,1476.38 v1@1202.77,1476.38 ; v1(1240.16,1594.49) Cvcc.1@1295.28,1594.49 ; U3.12 U3.12@1253.41,1469.49 ; U3.11 1215.57,1489.17 v1@1202.77,1476.38 ; U3.15@1253.27,1345.03 1256.67,1348.43 U3.15@1259.84,1348.43 ; Cvcc.1@1299.21,1594.49 1302.64,1591.06 U3.8 ; RPI1.9@1377.95,2667.32 1379.92,2667.32 1429.13,2716.54 1529.13,2716.54 RPI1.14 ; R5.1 1446.85,2205.71 1456.16,2215.02 1457.15,2215.02 1476.38,2234.25 v1(1555.12,2234.25) 1555.12,2262.07 1608.75,2315.7 1608.75,2328.71 1619.05,2339.01 U1.2 ; RPI1.14@1584.65,2765.75 1584.65,2772.05 1617.72,2805.12 1803.71,2805.12 1842.11,2766.72 1878.95,2766.72 RPI1.20 ; Cout.1@1624.02,1555.12 Cout.1@1624.02,1564.96 ; U2.10 1985.24,2239.82 1989.29,2235.77 2001.5,2235.77 2012.86,2224.41 v1(2017.72,2224.41) ; v1(2411.42,2421.26) 2411.42,2419.54 2460.63,2370.32 U4.14@2460.63,2352.36 ; U4.9@2716.54,2342.52 2716.54,2408.83 2726.38,2418.67 v1(2726.38,2421.26) 2879.13,2574.02 RPI1.39
  Top Layer w10: U5.9 1299.21,1820.87 ; U5.7 1299.21,1860.24 ; v1(1253.27,1315.5) U3.15@1253.27,1345.03 ; U5.10@1259.84,1801.18 1296.28,1801.18 1299.21,1804.11 1299.21,1820.87 ; U5.8@1259.84,1840.55 1299.21,1840.55 ; U5.5 1299.21,1860.24 ; 1349.77,1335.4 1349.77,1313.77 v1(1350.29,1313.25) ; Cout.1@1624.02,1555.12 v1(1683.07,1555.12) ; Cout.1@1624.02,1584.65 v1(1683.07,1584.65) ; Cout.1@1624.02,1614.17 v1(1683.07,1614.17) ; 1299.21,1820.87 1299.21,1840.55 ; 1299.21,1840.55 1299.21,1860.24
  Top Layer w15: J13.2@1811.02,787.4 J9.2
  Bottom Layer w5: RPI1.14 1544.49,2766.54 1505.91,2805.12 1446.85,2805.12 1437.01,2795.28 1437.01,2746.06 1456.69,2726.38 1496.06,2726.38 1520.67,2701.77 1520.67,2623.03 1652.91,2490.79 1662.75,2490.79 C4.1@1663.39,2490.16
  other v1: 1525.59,1732.28 1190.94,1811.02 1190.94,1850.39
GPIO4: J5.1 RPI1.7 | length 2450.4
  Top Layer w5: v1(2066.93,1742.13) 2372.05,1742.13 2421.26,1692.91 J5.1@2421.26,1053.15
  Bottom Layer w5: RPI1.7 1328.9,2616.77 1328.9,2163.95 1632.77,1860.08 1642.46,1850.39 1958.66,1850.39 v1(2066.93,1742.13)
GPIO5: J5.2 RPI1.29 | length 1697.7
  Bottom Layer w5: RPI1.29@2379.13,2666.31 2412.16,2633.28 2455.43,2633.28 2488.87,2599.84 2488.87,1131.82 2519.68,1101.01 J5.2
GPIO6: J5.3 RPI1.31 | length 1691.8
  Bottom Layer w5: RPI1.31 2479.13,2625 2499.8,2604.34 2499.8,1136.57 2554.96,1081.42 2588.86,1081.42 J5.3
GPIO12: J5.4 RPI1.32 | length 1889.6
  Bottom Layer w5: RPI1.32 2479.13,2729.79 2519.6,2689.32 2519.6,2629.86 2510.88,2621.14 2510.88,2617.53 2509.84,2616.49 2509.84,1141.36 2559.79,1091.42 2677.29,1091.42 J5.4
GPIO16: J6.1 RPI1.36 | length 2665
  Bottom Layer w5: J6.1 2425.99,782.67 2455.52,782.67 2500,738.19 2758.52,738.19 2766.01,745.68 2766.01,1076.78 2731.07,1111.72 2569.29,1111.72 2532.51,1148.5 2532.51,2604.44 2555.75,2627.68 2596.23,2627.68 2617.89,2649.34 2617.89,2705.29 RPI1.36
GPIO19: J6.2 RPI1.33 | length 2383.8
  Bottom Layer w5: J6.2 2520.37,786.72 2553.94,786.72 2591.69,748.97 2746.97,748.97 2755.49,757.48 2755.49,1072.01 2725.79,1101.72 2563.9,1101.72 2520.88,1144.73 2520.88,2614.06 2523.81,2616.99 2529.59,2616.99 RPI1.33
GPIO22: J6.3 RPI1.15 | length 2984.8
  Bottom Layer w5: RPI1.15 1720.72,2708.12 1720.72,2793.56 1751.97,2824.8 2319.34,2824.8 2322.27,2821.87 2322.27,2640.71 2356.74,2606.23 2452.82,2606.23 2466.67,2592.38 2466.67,919.06 2587.93,797.8 2607.71,797.8 J6.3
GPIO23: J6.4 RPI1.16 | length 3001.1
  Bottom Layer w5: RPI1.16 1745.78,2833.18 1747.4,2834.8 2329.67,2834.8 2332.58,2831.9 2334.58,2645.74 2336.02,2644.29 2357.41,2622.91 2451.66,2622.91 2477.66,2596.91 2477.66,923.44 2564.48,836.61 2631.6,836.61 2680.81,787.4 J6.4
GPIO24: J9.1 R1.1 RPI1.18 | length 2438.2
  Bottom Layer w5: R1.1 1709.67,984.25 ; 1712.6,984.25 1830.71,984.25 1948.82,1102.36 2086.61,1102.36 2096.14,1111.89 2096.14,2559.37 2017.4,2638.11 2017.4,2716.85 2011.15,2723.1 1822.57,2723.1 RPI1.18 ; 1712.6,987.18 J9.1 J9.1@1712.6,1053.15
GPIO25: J10.1 R2.1 RPI1.22 | length 1880
  Bottom Layer w5: RPI1.22 1988.84,2766.54 2027.4,2727.97 2027.4,2642.25 2106.14,2563.51 2106.14,1091.38 J10.1 2038.43,1023.66 2033.7,1023.66 2018.64,1008.6 2018.64,985.17 R2.1
GPIO26: J13.1 R3.1 RPI1.37 | length 3615.3
  Bottom Layer w5: R3.1 1670.28,894.69 1712.6,852.36 J13.1 1741.1,757.91 1742.09,757.91 1776.83,723.17 2760.57,723.17 2776.54,739.14 2776.54,1081.21 2734.68,1123.07 2572.45,1123.07 2542.99,1152.52 2542.99,2600.38 2559.83,2617.22 2600.94,2617.22 2628.45,2644.73 2628.45,2697.35 2651.17,2720.07 2712.08,2720.07 2765.61,2666.54 RPI1.37
GPIO27: J14.1 R4.1 RPI1.13 | length 2753.2
  Bottom Layer w5: RPI1.13 1579.89,2665.78 1616.89,2665.78 1655.47,2627.21 1702.07,2627.21 1732.28,2657.42 1732.28,2790.98 1746.43,2805.12 1997.17,2805.12 2017.93,2784.35 2017.93,2760.46 2037.4,2741 2037.4,2647.64 2116.14,2568.9 2116.14,1020.69 2103.13,1007.68 2052.52,1007.68 2049.59,1004.75 2049.59,951.89 2046.66,948.96 2027.63,948.96 2018.15,939.48 2018.15,896.1 R4.1 2017.72,831.86 J14.1
I2C0_SCL: J4.2 RPI1.5 | length 2529.3
  Top Layer w5: v1(1496.06,1948.82) 2874.02,1948.82 2972.44,2047.24 3021.65,2047.24 J4.2
  Bottom Layer w5: RPI1.5 1191.73,2666.54 1308.74,2549.53 1308.74,2116.46 1437.01,1988.19 1437.01,1968.5 1456.69,1948.82 v1(1496.06,1948.82)
I2C0_SDA: J4.1 RPI1.3 | length 2566.8
  Top Layer w5: RPI1.3 1119.29,2706.69 v1(1230.32,2706.69) ; v1(1466.54,1978.35) 1469.12,1978.35 1478.96,1968.5 2844.49,1968.5 2972.44,2096.46 J4.1@2982.28,2096.46
  Bottom Layer w5: v1(1230.32,2706.69) 1230.32,2647.64 1318.9,2559.06 1318.9,2125.98 v1(1466.54,1978.35)
NetC2_2: C2.2 U2.9 Y1.2 | length 330.1
  Top Layer w5: U2.9 1959.15,2259.35 1959.15,2165.85 v1(1958.66,2165.35) 1962.3,2161.72 1972.14,2161.72 1998.56,2135.3 2001.33,2132.52 2070.23,2132.52 Y1.2
  Bottom Layer w5: C2.2 v1(1958.66,2165.35)
NetC3_2: C3.2 U2.8 Y1.1 | length 375.2
  Top Layer w5: Y1.1 1771.12,2135.3 1840.02,2135.3 1870.08,2165.35 v1(1889.76,2165.35) 1919.29,2165.35 1934.06,2180.12 U2.8
  Bottom Layer w5: C3.2@1889.76,2106.3 v1(1889.76,2165.35)
NetCboot_1: Cboot.1 U3.3 U3.4 | length 226.7
  Top Layer w5: Cboot.1@1315.75,1269.68 1322.05,1275.99 1322.05,1373.36 1323.72,1375.03 1323.72,1411.43 1349.68,1437.38 1349.68,1447.38 1352.1,1449.8 U3.3 U3.4 ; Cboot.1 Cboot.1@1319.96,1271.14
NetCboot_2: Cboot.2 L1.1 U3.16 | length 296.7
  Top Layer w5: Cboot.2@1283.93,1271.73 1287.38,1275.18 1287.38,1275.55 1289.37,1277.54 1289.37,1326.28 1299.21,1336.12 U3.16@1299.21,1338.58 ; Cboot.2 1285.31,1269.56 1304.63,1250.25 1485.49,1250.25 1495.08,1259.84 L1.1@1496.06,1259.84
NetCvcc_2: Cvcc.2 U3.6 U3.9 | length 194.4
  Top Layer w5: U3.9 1284.84,1510.43 1284.84,1488.56 1287.77,1485.63 1323.29,1485.63 1344.16,1506.49 1344.16,1511.48 U3.6@1348.43,1515.75 ; U3.6 1349.7,1517.54 1356.47,1517.54 1361.04,1522.11 1361.04,1576.78 Cvcc.2
NetJ15_2: J15.2 R7.2 | length 153.8
  Top Layer w5: R7.2@1062.99,2342.52 1162.2,2342.52 J15.2
NetR5_2: R5.2 U1.8 | length 80.4
  Top Layer w5: R5.2 1414.37,2205.71 1414.37,2280.51 U1.8@1417.32,2283.46
NetR6_1: R6.1 U2.19 | length 116.7
  Top Layer w5: U2.19 1780.51,2427.39 1791.34,2416.56 v1(1791.34,2411.42)
  Bottom Layer w5: R6.1 v1(1791.34,2411.42)
NetRfbb_2: Rfbb.2 Rfbt.1 U3.7 | length 146.5
  Top Layer w5: U3.7@1322.16,1518.84 1322.16,1533.11 1331.6,1542.54 v1(1331.6,1545.92)
  Bottom Layer w5: v1(1331.6,1545.92) 1331.6,1542.05 1340.16,1533.49 1340.16,1505.37 1347.16,1505.37 Rfbb.2@1347.84,1504.69 ; Rfbb.2@1338.58,1496.06 1339.11,1496.06 1348.43,1486.75 Rfbt.1
NetU2_13: U2.13
NetU4_1: U4.1 U5.11 | length 1430.9
  Top Layer w5: v1(1269.68,1722.44) 1269.68,1727.58 1279.53,1737.42 U5.11 ; v1(1407.48,1978.35) 1427.17,1978.35 1456.69,2007.87 1476.38,2007.87 1496.06,1988.19 2230.71,1988.19 2358.66,2116.14 U4.1@2362.2,2116.14
  Bottom Layer w5: v1(1269.68,1722.44) 1328.74,1722.44 1407.48,1801.18 v1(1407.48,1978.35)
NetU5_6: U5.6
RESET: Rreset.2 U3.10 | length 250.9
  Top Layer w5: U3.10 1255.22,1514.76 1248.17,1507.72 1228.5,1507.72 1210.63,1525.59 1210.63,1614.17 1220.47,1624.02 1270.49,1624.02 1290.71,1644.23 1290.89,1644.23 1296.26,1649.61 Rreset.2@1296.26,1653.54
SPI0_CE0_N: RPI1.24 U2.18 | length 500.1
  Top Layer w5: U2.18 1806.1,2524.61 1830.71,2549.21 1830.71,2696.85 1850.39,2716.54 2029.13,2716.54 RPI1.24
SPI0_CE1_N: J7.2 RPI1.26 | length 1870.8
  Top Layer w5: v1(2244.09,1820.87) 2934.06,1820.87 3080.71,1674.21 J7.2@3080.71,1673.23
  Bottom Layer w5: RPI1.26@2179.47,2766.54 2224.41,2721.59 2224.41,1840.55 v1(2244.09,1820.87)
SPI0_MISO: J7.3 RPI1.21 U2.17 | length 2282.1
  Top Layer w5: U2.17 1831.69,2513.15 1840.71,2522.16 1840.71,2692.71 1854.54,2706.54 1939.13,2706.54 RPI1.21 ; v1(2057.09,1899.61) 2076.77,1919.29 2135.83,1919.29 2214.57,1840.55 2253.94,1840.55 2263.62,1830.87 3022.48,1830.87 3080.71,1772.64 J7.3@3080.71,1771.65
  Bottom Layer w5: RPI1.21 1979.13,2607.48 2076.93,2509.69 2076.93,1919.45 v1(2057.09,1899.61)
SPI0_MOSI: J7.4 RPI1.19 U2.16 | length 2142.6
  Top Layer w5: U2.16 1857.28,2636.02 1879.92,2658.66 RPI1.19@1879.92,2667.32 ; v1(2027.56,1929.13) 2072.47,1929.13 2072.63,1929.29 2145.51,1929.29 2224.25,1850.55 2263.62,1850.55 2273.31,1840.87 3038.95,1840.87 3068.16,1870.08 J7.4
  Bottom Layer w5: RPI1.19 1889.36,2656.31 1916.16,2656.31 2066.93,2505.54 2066.93,1968.5 v1(2027.56,1929.13)
SPI0_SCLK: J7.1 RPI1.23 U2.14 | length 2227.3
  Top Layer w5: U2.14@1909.45,2490.16 1909.45,2618.11 1919.29,2627.95 2040.55,2627.95 RPI1.23 ; v1(2194.88,1801.18) 2854.33,1801.18 3053.52,1601.99 3054.51,1601.99 3080.71,1575.79 J7.1@3080.71,1574.8
  Bottom Layer w5: RPI1.23 2214.41,2531.26 2214.41,1820.71 v1(2194.88,1801.18)
SPI01_CE0_N: RPI1.12 U4.10 | length 1616
  Top Layer w5: v1(2037.4,2303.15) 2066.93,2273.62 2647.64,2273.62 2664.37,2290.35 U4.10
  Bottom Layer w5: RPI1.12 1535.43,2710.24 1535.43,2627.95 1555.12,2608.27 1938.98,2608.27 2037.4,2509.84 v1(2037.4,2303.15)
SPI1_CE1_N: J8.2 RPI1.11 | length 2997
  Top Layer w5: v1(2066.93,1781.5) 2805.12,1781.5 3011.81,1574.8 3011.81,1194.07 3080.71,1125.17 J8.2@3080.71,1122.05
  Bottom Layer w5: RPI1.11 1411.02,2598.43 1341.83,2598.43 1338.9,2595.5 1338.9,2168.1 1636.91,1870.08 1978.35,1870.08 v1(2066.93,1781.5)
SPI1_MISO: J8.3 RPI1.35 U4.12 | length 2499.4
  Top Layer w5: U4.12 2564.37,2401.35 2679.13,2516.11 RPI1.35
  Bottom Layer w5: RPI1.35@2678.71,2666.54 2608.09,2595.92 2572.63,2595.92 2566.56,2589.85 2566.56,1162.97 2583.65,1145.88 3009.23,1145.88 J8.3
SPI1_MOSI: J8.4 RPI1.38 U4.11 | length 3201.1
  Top Layer w5: U4.11 2614.37,2437.2 2716.54,2539.37 2716.54,2703.94 RPI1.38
  Bottom Layer w5: RPI1.38@2785.43,2775.59 2816.67,2806.83 2900.46,2806.83 2923.23,2784.06 2923.23,2650.6 2891.16,2618.53 2645.55,2618.53 2612.68,2585.66 2582.14,2585.66 2576.71,2580.23 2576.71,1169.97 2589.8,1156.88 3003.52,1156.88 3044.62,1197.97 3044.62,1240.96 3075.98,1272.32 3075.98,1311.05 J8.4
SPI1_SCLK: J8.1 RPI1.40 U4.13 | length 3325.4
  Top Layer w5: U4.13 2520.5,2346.88 2520.5,2372.72 2523.68,2375.89 2523.68,2376.04 2657.48,2509.84 2657.48,2618.11 2637.8,2637.8 2637.8,2687.01 2667.32,2716.54 2706.69,2716.54 2736.22,2746.06 2736.22,2789.89 2751.45,2805.12 2840.55,2805.12 RPI1.40 ; U4.13@2519.68,2312.99 2519.68,2310.09 U4.13@2523.65,2306.13
  Bottom Layer w5: RPI1.40@2874.02,2755.91 2823.47,2705.36 2823.47,2648.84 2803.15,2628.53 2760.67,2628.53 2732.82,2656.38 2732.82,2680.56 2706.69,2706.69 2657.48,2706.69 2638.45,2687.67 2638.45,2640.43 2605.24,2607.22 2563.98,2607.22 2554.5,2597.75 2554.5,1156.96 2577.1,1134.36 3009.34,1134.36 3031.5,1112.2 3031.5,1075.95 J8.1
UART_RX: J11.2 RPI1.10 | length 2073.6
  Top Layer w5: RPI1.10 1436.15,2823.55 2904.79,2823.55 2920.13,2808.22 2920.13,2640.89 3080.71,2480.32 J11.2
UART_TX: J11.1 RPI1.8 | length 2420.4
  Top Layer w5: RPI1.8@1279.53,2765.75 1348.43,2834.65 2913.39,2834.65 2937.52,2810.51 2937.52,2653.03 3129.92,2460.63 3129.92,2342.52 3110.24,2322.83 3031.5,2322.83 J11.1
VCC3V3: C1.2 C4.2 J3.1 R1.2 R2.2 R3.2 R4.2 R6.2 RPI1.1 RPI1.17 U1.3 U2.20 U4.15 U4.16 U5.12 | length 2332.7
  Top Layer w5: v1(1122.05,1702.76) 1131.89,1692.91 1289.37,1692.91 1299.21,1702.76 U5.12 ; U1.3@1634.08,2391.73 U1.3 ; U2.20@1751.97,2500 U2.20@1753.24,2501.27 ; U2.20@1754.92,2500 U2.20@1754.92,2511.26
  Top Layer w10: 1564.96,2588.58 v1(1564.96,2391.73) U1.3@1634.08,2391.73 ; v1(1712.6,2362.2) 2352.36,2362.2 ; 1732.28,2588.58 v1(1732.28,2539.37) 1754.73,2516.92 U2.20@1754.73,2495.79
  Bottom Layer w5: J3.1@1387.8,905.51 1387.8,906.5 1415.32,934.02 1416.3,934.02 1421.95,939.67 1636.81,939.67 ; R3.2@1633.86,895.67 1636.81,898.62 1636.81,939.67 ; R1.2 1636.81,939.67 ; C4.2@1702.76,2491.14 C4.2 C4.2@1712.07,2480.85 ; R6.2@1712.6,2405.51 R6.2 ; v1@1731.48,2538.57 v1(1732.28,2539.37) ; RPI1.17@1771.65,2659.05 RPI1.17@1771.65,2667.32 ; R2.2@1978.35,984.25 1984.25,978.35 1984.25,939.67 ; R4.2 1984.25,939.67 ; 1636.81,939.67 1984.25,939.67
  Bottom Layer w10: C1.2@1564.96,2352.36 v1(1564.96,2391.73) ; C4.2 1702.76,2427.17 1710.71,2419.21 1711.69,2419.21 1718.5,2412.4 R6.2 ; C4.2@1702.76,2491.14 1731.48,2519.87 v1@1731.48,2538.57 ; v1(1712.6,2362.2) R6.2@1712.6,2405.51
  other v1: 1122.05,1368.11 1122.05,1407.48
VCC5V1: J2.1 RPI1.2 RPI1.4 U5.3-4
  other v1: 1342.94,1923.8 1371.31,1923.8 1356.63,1947.38 1370.82,1969.81 1343.6,1970.63
VCC5V1-UM: Cbias.2 Cout.2 L1.2 Rfbt.2 Rreset.1 U3.5 U5.1-2 | length 76.6
  Top Layer w5: Rreset.1@1358.33,1661.44 1358.33,1654.37 Rreset.1@1360.69,1652.01 ; v1(1437.01,1466.54) v1@1438.67,1468.2 ; Cbias.2@1488.02,1695.84 Cbias.2 ; Cout.2@1496.06,1594.49 Cout.2@1500.79,1599.21
  Bottom Layer w5: Rfbt.2@1397.64,1437.01 1397.64,1437.99 1405.96,1446.32 1418.22,1446.32 1437.01,1465.11 v1(1437.01,1466.54)
VCCGLV: Cin1.2 Cin.2 Cinx1.2 Cinx.2 J1.1 U3.2 U3.13 U3.14 | length 138.3
  Top Layer w5: U3.13 1242.09,1412.85 U3.14@1247.46,1407.48 ; U3.2 1371.56,1407.48 1387.6,1391.43 1394,1391.43 v1@1397.64,1387.8
  Top Layer w15: v1(1200.79,1407.48) U3.14
  other v1: 1402.79,1387.05
pads on no net: RPI1.27 RPI1.28 U1.5 U2.3 U2.4 U2.5 U2.6 U2.7 U2.11 U2.12 U2.15 U4.2 U4.3 U4.4 U4.5 U4.6 U4.7 U4.8

## Polygon pours and split planes (outlines as drawn)
GND on Bottom Layer "GND_L02_P018" (solid, remove dead copper, pour order 18): 649.61,2854.33 3208.66,2854.33 3208.66,649.61 649.61,649.61
VCC5V1 on Bottom Layer "VCC5V1_L02_P007" (solid, pour order 7): 935.04,2814.96 935.04,2726.38 1023.62,2726.38 1023.62,2618.11 1053.15,2579.32 1053.15,2132.21 1230.32,1958.66 1285.43,1958.66 1324.8,1909.45 1387.8,1909.45 1387.8,1988.19 1358.27,2017.72 1249.12,2017.72 1113.8,2155.08 1113.8,2579.32 1141.73,2618.11 1141.73,2814.96
VCC3V3 on Bottom Layer "VCC3V3_L02_P013" (solid, pour order 13): 990.1,2390.91 935.04,2450.79 935.04,2706.69 1013.78,2706.69 1013.78,2440.94 1033.46,2421.26 1033.46,2125.98 1141.73,2017.72 1141.73,1348.43 1122.05,1348.43 1102.36,1348.43 1102.36,1998.03 990.1,2110.3 990.1,2204.72
VCCGLV on Bottom Layer "VCCGLV_L02_P003" (solid, pour order 3): 1387.8,1387.8 1387.8,1269.68 1417.32,1269.68 1417.32,1387.8
VCCGLV on Bottom Layer "VCCGLV_L02_P002" (solid, pour order 2): 1210.63,1407.48 1210.63,1279.53 1190.94,1279.53 1190.94,1407.48
VCCGLV on Bottom Layer "VCCGLV_L02_P001" (solid, pour order 1): 1545.28,1289.37 1545.28,1219.12 1451.77,1219.12 1451.77,1210.63 1141.73,1210.63 1141.73,1216.51 943.11,1216.51 841.54,1112.2 743.11,1112.2 743.11,1210.63 841.54,1210.63 920.28,1289.37
GND on Top Layer "GND_L01_P009" (solid, pour order 9): 1249.09,1879.92 1249.09,1781.5 1160.51,1781.5 1160.51,1879.92
VCC3V3 on Top Layer "VCC3V3_L01_P017" (solid, pour order 17): 1102.36,1427.17 1141.73,1427.17 1141.73,1171.26 1364.31,948.68 1429.89,948.68 1429.89,861.12 1341.19,861.12 1341.19,922.59 1102.36,1161.42
VCC5V1 on Top Layer "VCC5V1_L01_P008" (solid, pour order 8): 1387.8,1840.55 1387.8,1988.19 1328.74,1988.19 1171.26,1988.19 1003.36,1811.02 1003.76,974.82 1042.96,935.62 1042.96,856.95 1136.56,856.95 1136.56,952.38 1082.68,954.72 1033.17,1004.23 1033.17,1797.47 1183.94,1958.66 1328.74,1958.66 1328.74,1840.55
VCC3V3 on Top Layer "VCC3V3_L01_P011" (solid, pour order 11): 1732.28,2706.69 1732.28,2618.11 1023.62,2618.11 1023.62,2706.69 935.04,2706.69 935.04,2568.9 1820.87,2568.9 1820.87,2706.69
VCC3V3 on Top Layer "VCC3V3_L01_P012" (solid, pour order 12): 2431.1,2381.89 2431.1,2303.15 2342.52,2303.15 2342.52,2381.89
VCC5V1-UM on Top Layer "3" (solid, pour order 5): 1492.77,1705.4 1493.15,1663.39 1493.15,1417.32 1456.69,1417.32 1456.69,1456.69 1428.98,1456.69 1428.98,1482.06 1369.61,1482.06 1369.61,1496.06 1418.49,1496.06 1452.49,1514.13 1452.49,1619.88 1438.51,1633.86 1338.19,1633.86 1339.47,1825.93 1369.61,1826.11 1369.61,1705.4

## Silkscreen, mask and mechanical layers (free items; w line width, h text height)
Top Overlay:
  text "-" at 689.13,2548.91 h60
  text "1" at 975,2540.16 h35 r90
  text "3" at 1100,2540.16 h35 r90
  text "5" at 1200,2540.16 h35 r90
  text "7" at 1300,2540.16 h35 r90
  text "9" at 1400,2540.16 h35 r90
  text "11" at 1500,2540.16 h35 r90
  text "13" at 1600,2540.16 h35 r90
  text "15" at 1700,2540.16 h35 r90
  text "17" at 1800,2540.16 h35 r90
  text "19" at 1900,2540.16 h35 r90
  text "21" at 2000,2540.16 h35 r90
  text "23" at 2100,2540.16 h35 r90
  text "25" at 2200,2540.16 h35 r90
  text "27" at 2300,2540.16 h35 r90
  text "29" at 2400,2540.16 h35 r90
  text "31" at 2500,2540.16 h35 r90
  text "33" at 2600,2540.16 h35 r90
  text "35" at 2700,2540.16 h35 r90
  text "37" at 2800,2540.16 h35 r90
  text "39" at 2900,2540.16 h35 r90
  text "+" at 689.13,2175.2 h60
  text "+" at 679.29,1269.69 h60
  text "+" at 1397.8,1023.63 h60
  text "+" at 1112.36,1013.78 h60
  text "-" at 679.29,905.21 h60
  text "-" at 1122.2,649.3 h60
  text "-" at 1417.48,649.3 h60
Bottom Overlay:
  circle w19.68: c954.72,2588.58 r9.84
M2: Outline:
  the board outline again, w10